# Altium PCB PCB1.PcbDoc
Units mil, origin at the board's own origin, x right, y up, seen from the top; angles counter-clockwise.
Board outline 6000 x 4000 mil, 2 copper layers (Top Layer, Bottom Layer); 20 components, 0 nets, 147 pads, 6 vias.
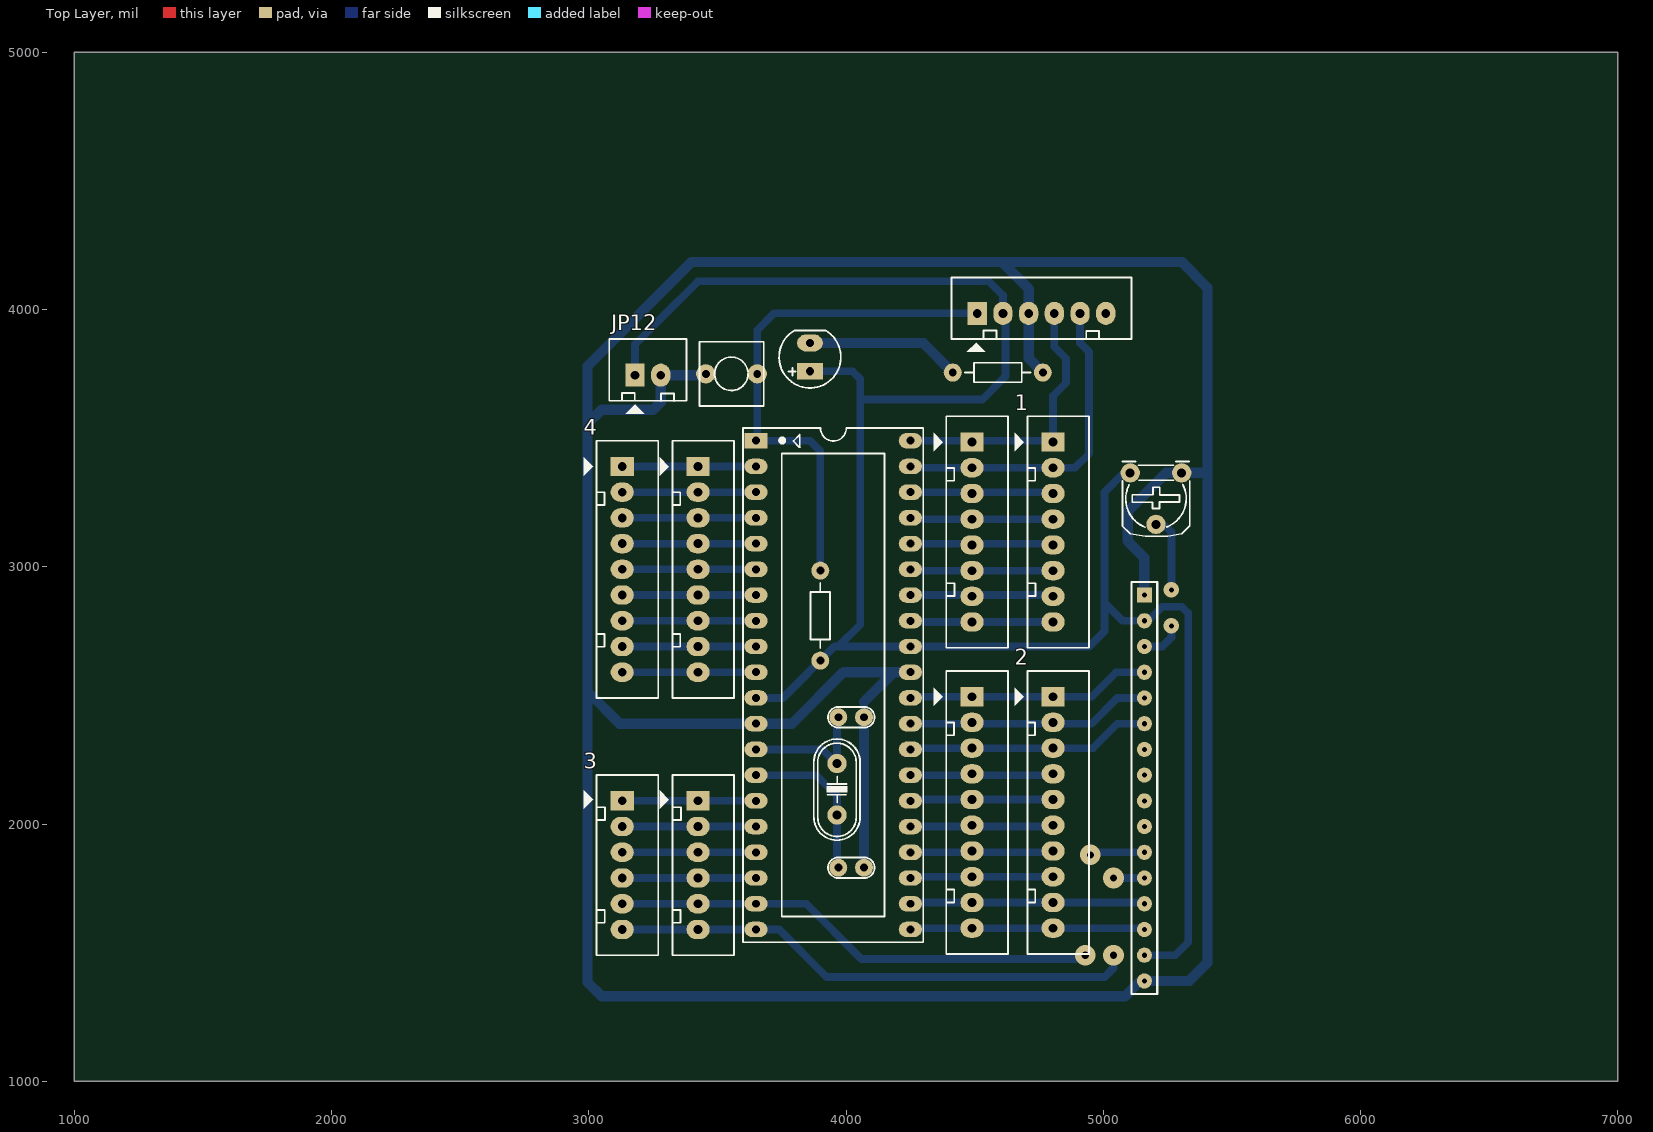
[diagram p0: Top Layer view]
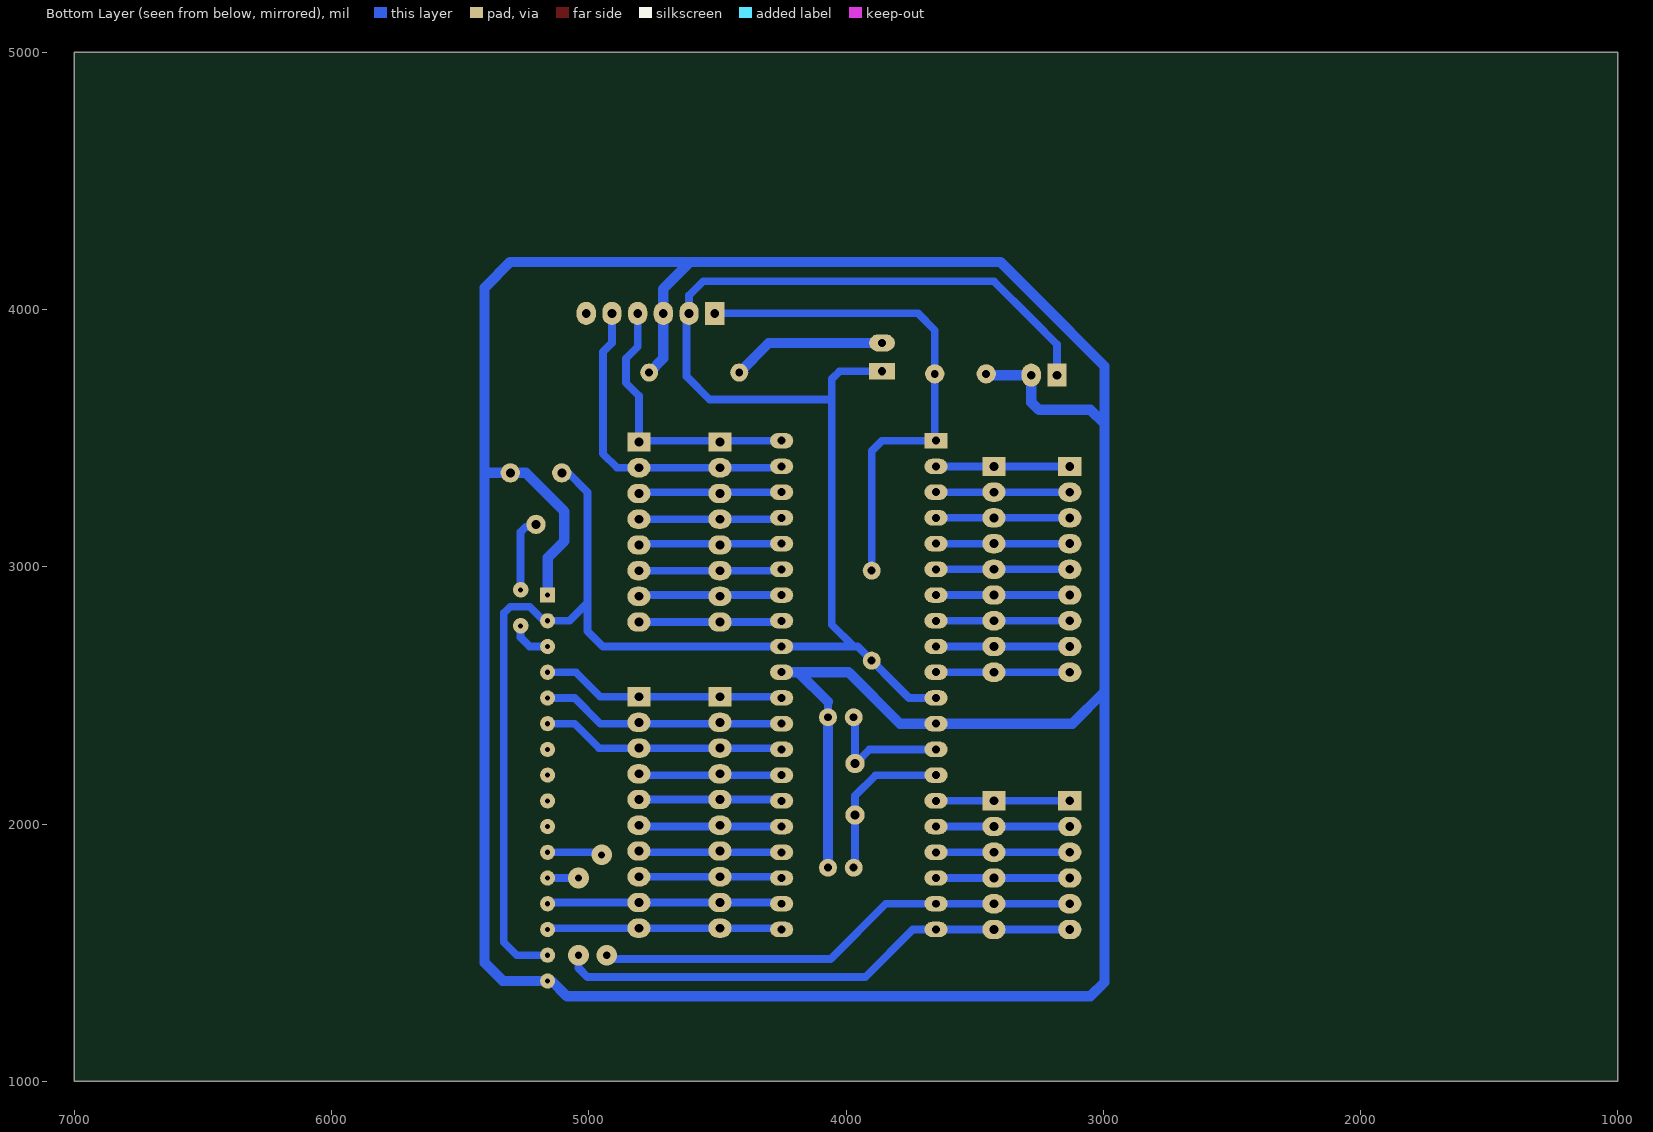
[diagram p1: Bottom Layer view, seen from below]

## Layer stack, top to bottom
Top Solder: solder mask 0.4, Solder Resist, Dk 3.5
Top Layer: signal copper 1.4
Dielectric 1: dielectric 12.6, FR-4, Dk 4.8
Bottom Layer: signal copper 1.4
Bottom Solder: solder mask 0.4, Solder Resist, Dk 3.5

## Board outline
1000,1000 7000,1000 7000,5000 1000,5000

## Design rules (kind name [scope] priority, off if disabled: settings)
Clearance [All] p1: gap=10
PolygonConnect [All] p1: connectstyle=Relief reliefconductorwidth=10 reliefentries=4 polygonreliefangle="90 Angle" airgapwidth=10
RoutingVias [All] p1: holewidth=28 width=50 viastyle="Through Hole" minholewidth=28 minwidth=50 maxholewidth=28 maxwidth=50
SolderMaskExpansion [All] p1: expansion=4
Width [All] p1: maxlimit=10 minlimit=10 preferedwidth=10
30 further rules are at their usual default settings.

## Components (designator, comment, footprint, x,y, rotation, side; value= is the part's Value field where it differs from the comment)
1 "JP8" CON8 4805,3485 r270 top (schematic designator JP3)
2 "Comment" CON10 4805,2495 r270 top
3 "JP6" CON6 3130,2090 r270 top (schematic designator JP1)
4 "Comment" CON9 3130,3390 r270 top
BT1 "BT" SW2 3455,3750 r0 top
Cx1 "33pF" CN1 3970,2415 r0 top
Cx2 "33pF" CN1 3970,1830 r0 top
IC1 "16F877A" DIP40/W0.6 3950,2515 r270 top
JP1 "JP6" CON6 3425,2090 r270 top
JP1 "JP6" CON6 4510,3985 r0 top
JP3 "JP8" CON8 4490,3485 r270 top
JP12 "JP2" CON2 3180,3745 r0 top (schematic designator JP2)
R1 "10k" R1/4W 3900,2985 r270 top
X1 "4Mhz" XT2 3965,2135 r90 top
? "Comment" VR 5305,3365 r180 top
? "Comment" HDR1X16 5160,2890 r270 top
? "Comment" CON10 4490,2495 r270 top
? "Comment" CON9 3425,3390 r270 top
? "Comment" LED-5TRED 3860,3815 r90 top
? "Comment" R1/4W 4415,3755 r0 top

## Footprints (in the part's own frame and the unit in brackets; to place one, negate y for a bottom-side part, rotate by r counter-clockwise, add the part's x,y. Pads: shape width x height; smd on the part's side, far side on the other; paste and mask are expansions set on the pad)
CN1 [mil]
  round 70 hole 31: 1(0,0) 2(100,0)
  silkscreen extent -40,-40 141,40, body extent -60,-30 170,37, height 265
CON2 [mil] "CON2"
  rect 75x90 hole 34: 1(0,0)
  oval 75x90 hole 34: 2(100,0)
  silkscreen extent -100,-150 200,140, body extent -76,-77 160,100, height 236
CON6 [mil] "CON6"
  rect 75x90 hole 34: 1(0,0)
  oval 75x90 hole 34: 2(100,0) 3(200,0) 4(300,0) 5(400,0) 6(500,0)
  silkscreen extent -100,-150 600,140
CON8 [mil] "CON8"
  rect 75x90 hole 34: 1(0,0)
  oval 75x90 hole 34: 2(100,0) 3(200,0) 4(300,0) 5(400,0) 6(500,0) 7(600,0) 8(700,0)
  silkscreen extent -100,-150 800,140
CON9 [mil]
  rect 75x90 hole 34: 1(0,0)
  oval 75x90 hole 34: 2(100,0) 3(200,0) 4(300,0) 5(400,0) 6(500,0) 7(600,0) 8(700,0) 9(800,0)
  silkscreen extent -100,-150 900,140
CON10 [mil] "CON10"
  rect 75x90 hole 34: 1(0,0)
  oval 75x90 hole 34: 2(100,0) 3(200,0) 4(300,0) 5(400,0) 6(500,0) 7(600,0) 8(700,0) 9(800,0) 10(900,0)
  silkscreen extent -100,-150 1000,140
DIP40/W0.6 [mil] "40 PIN, W 600mil, Pin to pin 100mil"
  rect 60x90 hole 31: 1(-975,-300)
  oval 60x90 hole 31: 2(-875,-300) 3(-775,-300) 4(-675,-300) 5(-575,-300) 6(-475,-300) 7(-375,-300) 8(-275,-300) 9(-175,-300) 10(-75,-300) 11(25,-300) 12(125,-300) 13(225,-300) 14(325,-300) 15(425,-300) 16(525,-300) 17(625,-300) 18(725,-300) 19(825,-300) 20(925,-300) 21(925,300) 22(825,300) 23(725,300) 24(625,300) 25(525,300) 26(425,300) 27(325,300) 28(225,300) 29(125,300) 30(25,300) 31(-75,300) 32(-175,300) 33(-275,300) 34(-375,300) 35(-475,300) 36(-575,300) 37(-675,300) 38(-775,300) 39(-875,300) 40(-975,300)
  silkscreen extent -1025,-350 975,350, body extent -1057,-310 1007,300, height 224
HDR1X16 [mm] "Connector; Header; 16 Position"
  rect 1.5x1.5 hole 0.508: 1(0,0)
  round 1.5 hole 0.508: 2(2.54,0) 3(5.08,0) 4(7.62,0) 5(10.16,0) 6(12.7,0) 7(15.24,0) 8(17.78,0) 9(20.32,0) 10(22.86,0) 11(25.4,0) 12(27.94,0) 13(30.48,0) 14(33.02,0) 15(35.56,0) 16(38.1,0)
  silkscreen extent -1.27,-1.27 39.37,1.27
LED-5TRED [mil] "LED 2 PIN, 5 ly , Only colour, pin to pin 110mil"
  rect 65x100 hole 32: 1(-55,0)
  oval 65x100 hole 32: 2(55,0)
  silkscreen extent -120,-120 104,120, body extent -116,-117 98,120, height 485
R1/4W [mil] "R 1/4W, 2 Pin, 350mil"
  round 70 hole 31: 1(0,0) 2(350,0)
  silkscreen extent 48,-38 302,38, body extent -40,-47 386,47, height 111
SW2 [mil] "SW button 2pin, 250x 250 mil"
  round 75 hole 31: 1(0,0) 2(200,0)
  silkscreen extent -25,-125 225,125, body extent -18,-116 218,128, height 197
VR [mil] "Resistor Variable"
  round 75 hole 35: 1(0,0) 2(100,200) 3(200,0)
  silkscreen extent -31,-44 231,246, body extent -87,-30 307,372, height 165
XT2 [mil] "Footpin for Crystal 2 pin"
  round 75 hole 34: 1(-100,0) 2(100,0)
  silkscreen extent -198,-90 195,90, body extent -233,-93 213,90, height 138

## Part data
1 JP3: library part Con8, "Connector 8"
3 JP1 JP1: library part Con6, "Connector 6"
BT1: library part BUTTON
Cx1 Cx2: library part CN0, "Cremic For Xtal 1pF => 100pF"
IC1: library part "PIC 16F877A"
JP12: library part Con2, "Connector 2"
R1: library part Res, "Res"
X1: library part XT2, "Crystal For all Crystal 2pin."

## Via types
v1: diameter 80, hole 28, Top Layer to Bottom Layer, 4 vias
v2: diameter 60, hole 20, Top Layer to Bottom Layer, 2 vias

## Nets (pads, with @x,y where several pads share a name; then routed paths per layer and width w, separated by ;. In a path a pad name is that pad's centre, name@x,y a point inside that pad or via, vN(x,y) a via of type N, cw(c..) or ccw(c..) an arc to the next point about the centre after c; other vN are vias at no path point)
pads on no net: 1.1 1.2 1.3 1.4 1.5 1.6 1.7 1.8 2.1 2.2 2.3 2.4 2.5 2.6 2.7 2.8 2.9 2.10 3.1 3.2 3.3 3.4 3.5 3.6 4.1 4.2 4.3 4.4 4.5 4.6 4.7 4.8 4.9 ?.1 ?.2 ?.3 ?.4 ?.5 ?.6 ?.7 ?.8 ?.9 ?.10 ?.11 ?.12 ?.13 ?.14 ?.15 ?.16 BT1.1 BT1.2 Cx1.1 Cx1.2 Cx2.1 Cx2.2 IC1.1 IC1.2 IC1.3 IC1.4 IC1.5 IC1.6 IC1.7 IC1.8 IC1.9 IC1.10 IC1.11 IC1.12 IC1.13 IC1.14 IC1.15 IC1.16 IC1.17 IC1.18 IC1.19 IC1.20 IC1.21 IC1.22 IC1.23 IC1.24 IC1.25 IC1.26 IC1.27 IC1.28 IC1.29 IC1.30 IC1.31 IC1.32 IC1.33 IC1.34 IC1.35 IC1.36 IC1.37 IC1.38 IC1.39 IC1.40 JP1.1 JP1.2 JP1.3 JP1.4 JP1.5 JP1.6 JP3.1 JP3.2 JP3.3 JP3.4 JP3.5 JP3.6 JP3.7 JP3.8 JP12.1 JP12.2 R1.1 R1.2 X1.1 X1.2
copper on no net: | length 50781.9
  Top Layer w10: 3450,3745 3455,3750
  Bottom Layer w10: 4850,3710 4855,3715 ; 5040,1440 5040,1450 ; 5080,3365 5105,3365 ; 5135,1790 5160,1790 ; 5145,1390 5160,1390 ; 5155,1695 5160,1690 ; 5160,2790 5175,2790 ; 5395,3365 5405,3375
  Bottom Layer w30: 3130,1590 3440,1590 ; 3130,1690 3435,1690 ; 3130,1790 3425,1790 3650,1790 ; 3130,1890 3425,1890 3650,1890 ; 3130,1990 3425,1990 3650,1990 ; 3130,2090 3425,2090 3650,2090 ; 3130,2590 3420,2590 ; 3130,2690 3425,2690 ; 3130,2790 3425,2790 ; 3130,2890 3425,2890 ; 3130,2990 3425,2990 ; 3130,3090 3425,3090 ; 3130,3190 3425,3190 ; 3130,3290 3425,3290 ; 3130,3390 3425,3390 ; 3180,3745 3180,3865 3275,3960 ; 3280,3965 3425,4110 4555,4110 4610,4055 4610,3985 ; 3410,2590 3650,2590 ; 3410,2690 3650,2690 ; 3410,2790 3650,2790 ; 3410,2890 3650,2890 ; 3410,2990 3650,2990 ; 3410,3090 3650,3090 ; 3410,3190 3650,3190 ; 3410,3290 3650,3290 ; 3410,3390 3645,3390 ; 3425,1590 3650,1590 3740,1590 3925,1405 5005,1405 5040,1440 ; 3425,1690 3650,1690 3845,1690 4060,1475 v1@4945,1475 ; 3650,2190 3885,2190 3965,2110 3965,2035 3965,1835 ; 3650,2290 3910,2290 ; 3650,2490 3755,2490 3955,2690 4250,2690 4310,2690 4945,2690 5005,2750 5005,2860 ; 3800,3490 3650,3490 ; 3860,3760 4025,3760 4055,3730 4055,3465 ; 3900,2290 3907.5,2290 3962.5,2235 ; 3900,2985 3900,3450 3860,3490 3650,3490 ; 3960,2235 3965,2235 3965,2410 ; 3970,2690 4055,2775 4055,3480 ; 4055,3650 4530,3650 4620,3740 4620,3965 ; 4070,2415 4070,2475 ; 4250,1795 4805,1795 ; 4250,1890 4820,1890 ; 4250,1990 4810,1990 ; 4250,2190 4805,2190 ; 4250,2390 4805,2390 4955,2390 5055,2490 5160,2490 ; 4250,2890 4795,2890 ; 4250,3090 4805,3090 ; 4250,3290 4805,3290 ; 4250,3490 4805,3490 4805,3665 4850,3710 ; 4255,1595 4810,1595 ; 4255,1695 4795,1695 ; 4255,2095 4805,2095 ; 4255,2295 4805,2295 4960,2295 5055,2390 5160,2390 ; 4255,2495 4805,2495 4955,2495 5050,2590 5160,2590 ; 4255,2785 4805,2785 ; 4255,2985 4805,2985 ; 4255,3185 4805,3185 ; 4255,3385 4805,3385 4890,3385 4945,3440 4945,3835 4910,3870 4910,3985 ; 4510,3985 3720,3985 3655,3920 3655,3750 3655,3495 3650,3490 ; 4805,1595 5160,1595 ; 4805,1695 5155,1695 ; 4810,3985 4810,3855 4855,3810 4855,3715 ; v1@4950,1890 5160,1890 ; 5040,1450 v1(5040,1490) ; v1(5040,1790) 5160,1790 ; 5080,3365 5005,3290 5005,2860 ; 5160,1490 5280,1490 5330,1540 5330,2755 5330,2820 5305,2845 5230,2845 5175,2790 ; 5160,2690 5230,2690 5265,2725 v2@5265,2765 ; 5160,2790 5075,2790 5005,2860 ; 5210,3155 5245,3155 5265,3135 v2@5265,2920
  Bottom Layer w40: 2995,2535 2995,1385 3050,1330 3095,1330 5085,1330 5145,1390 ; 3450,3745 3280,3745 3280,3640 3250,3610 3050,3610 2995,3555 ; 3860,3870 4300,3870 4415,3755 ; 4070,1830 4070,2415 ; 4070,2475 4185,2590 ; 4250,2590 3990,2590 3790,2390 3650,2390 3120,2390 2995,2515 2995,3555 ; 4765,3755 4710,3810 4710,3985 4710,4080 4605,4185 ; 5160,1390 5335,1390 5405,1460 5405,3265 ; 5160,2890 5160,3035 5095,3100 5095,3215 5245,3365 5305,3365 5395,3365 ; 5405,3215 5405,4085 5305,4185 4605,4185 ; 2995,3555 2995,3780 3255,4040 3400,4185 4605,4185
  other v1: 4930,1490 4950,1880
  other v2: 5265,2770 5265,2910